# Altium PCB Main.PcbDoc (part 1 of 2)
Units mm, origin at the board's own origin, x right, y up, seen from the top; angles counter-clockwise.
Board outline 229.74 x 100.58 mm, 4 copper layers (Top Layer, Layer 1, Layer 2, Bottom Layer), stack 0.68 mm thick; 134 components, 86 nets, 560 pads, 37 vias.
Unrouted connection lines stored in the file: 186.
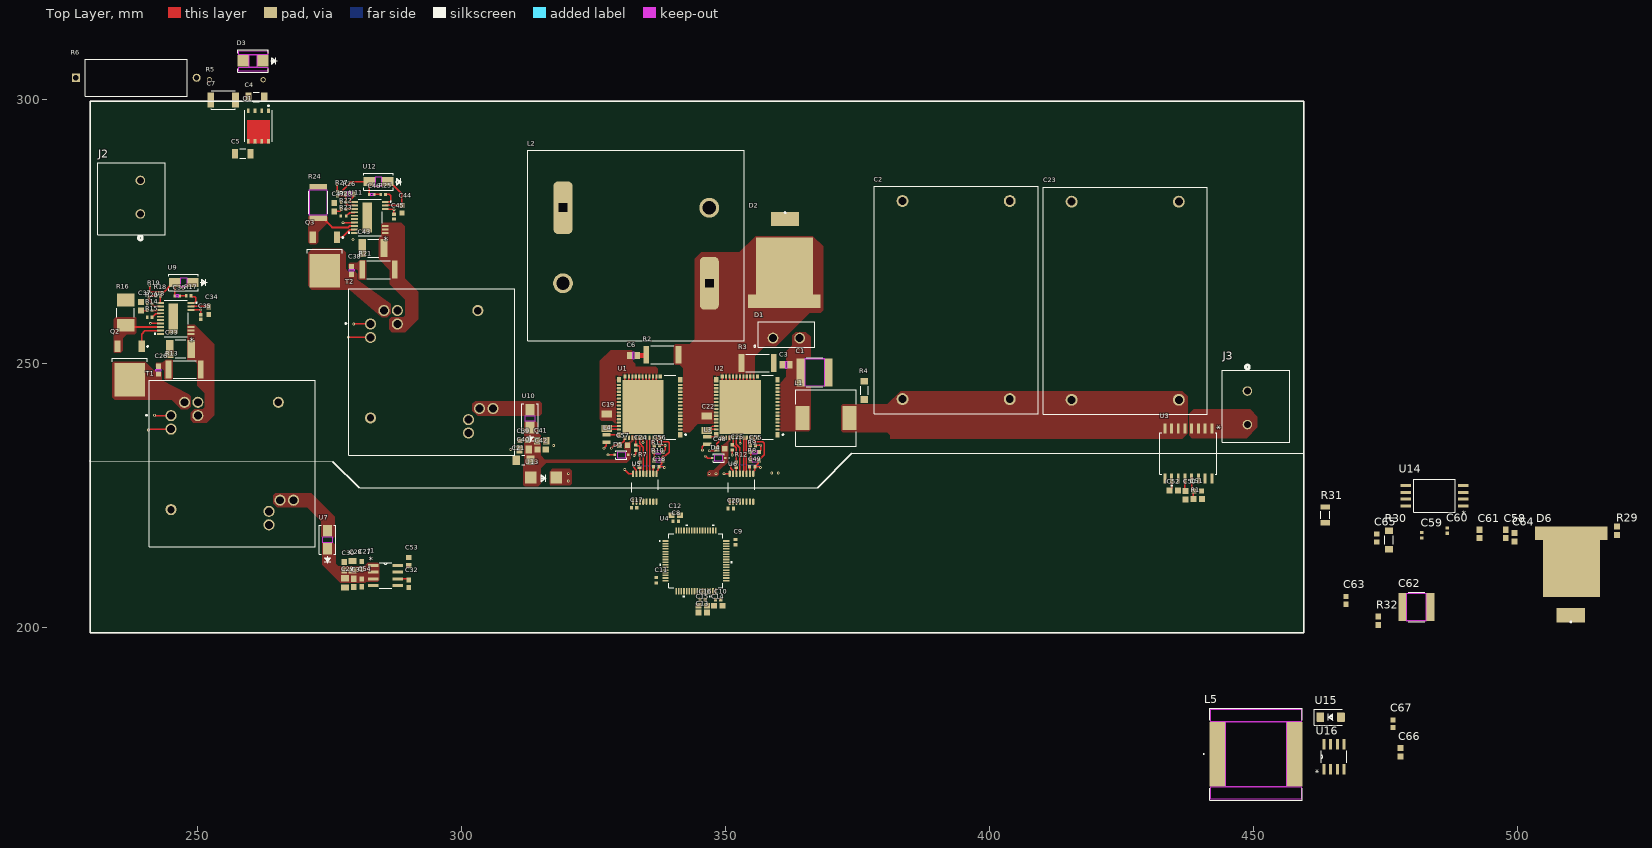
[diagram p0: Top Layer view]
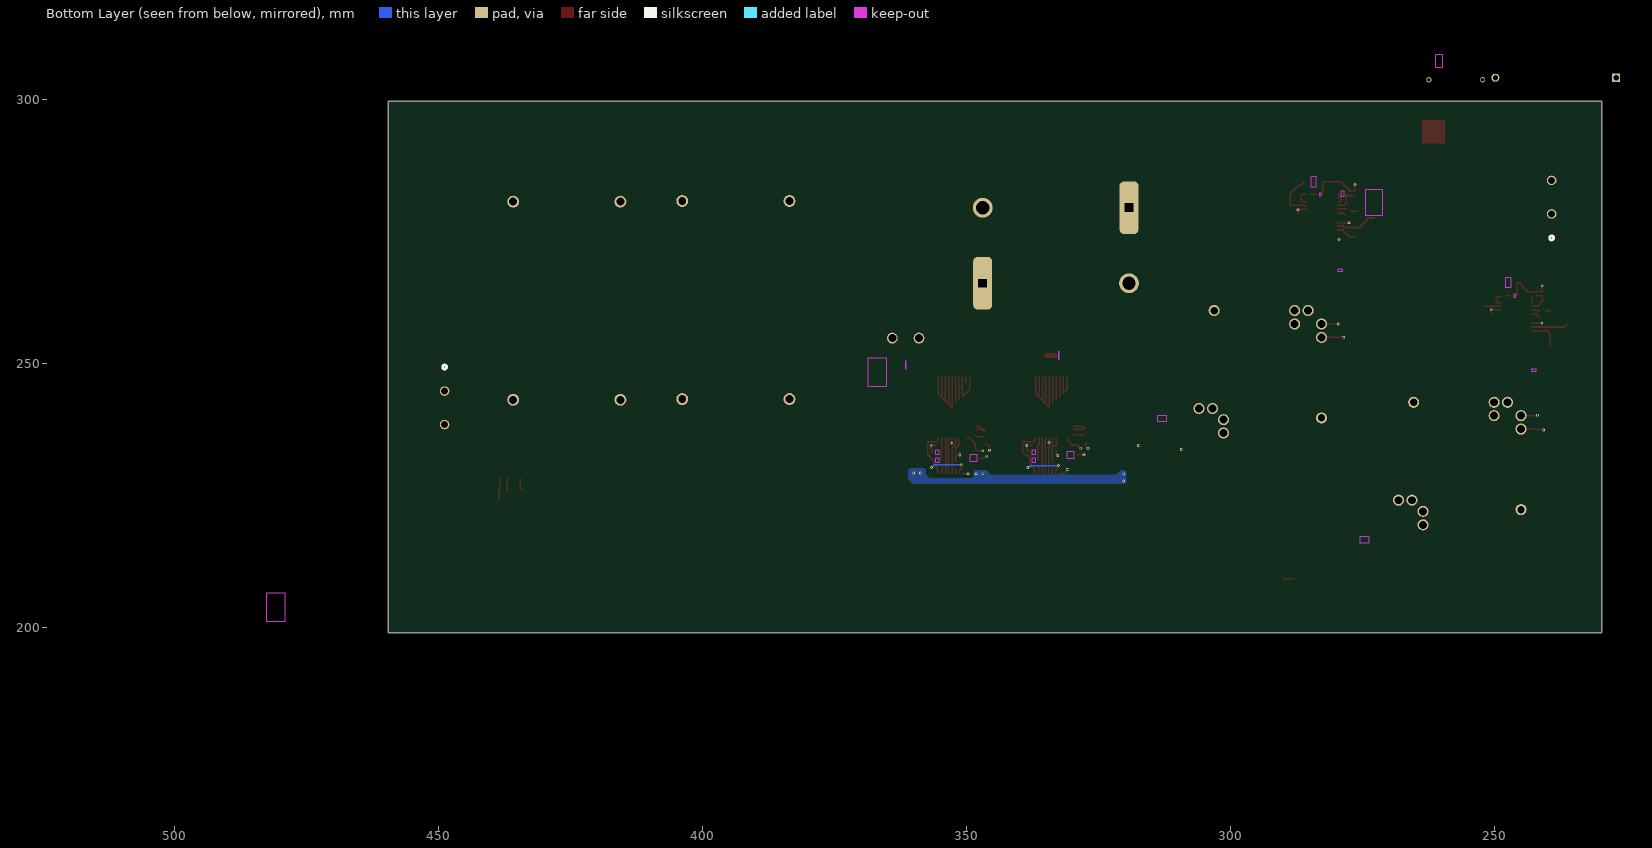
[diagram p1: Bottom Layer view, seen from below]
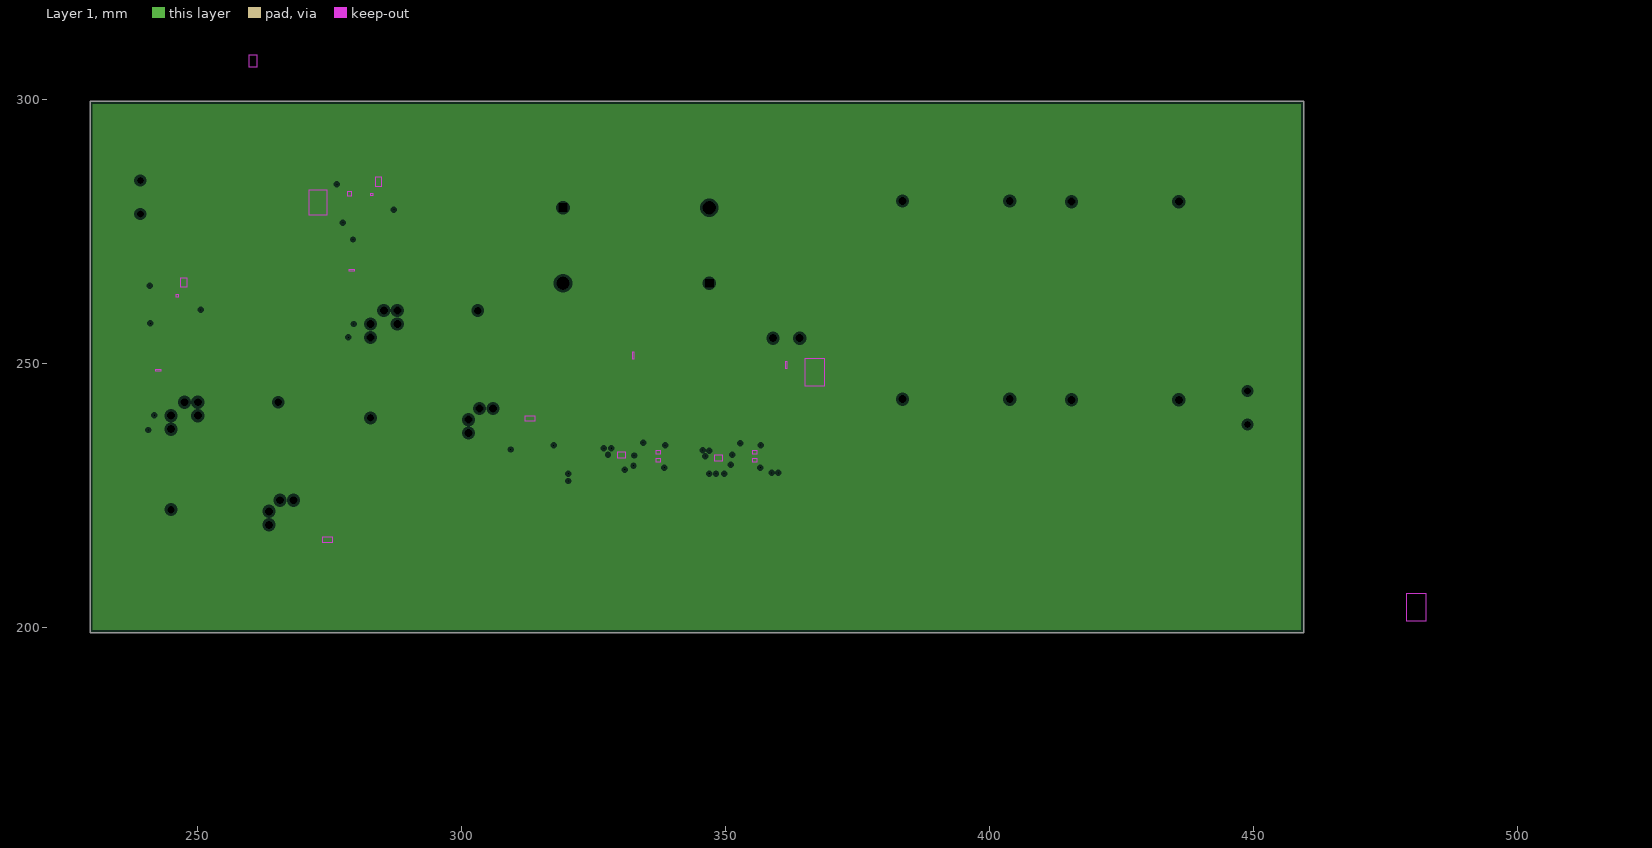
[diagram p2: Layer 1, clearances drawn from the general rule]
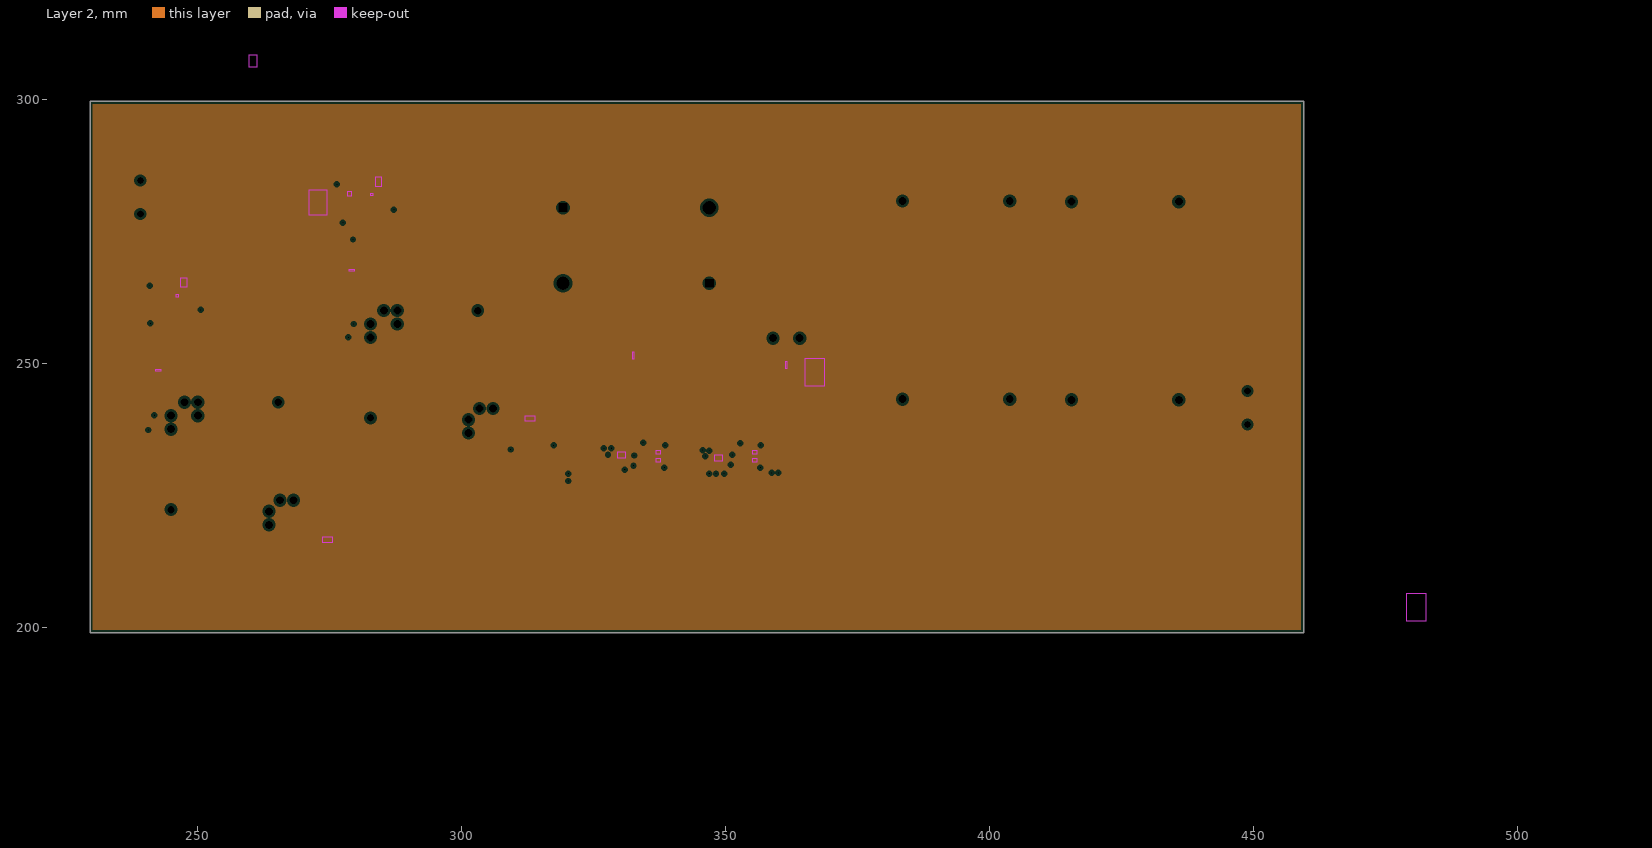
[diagram p3: Layer 2, clearances drawn from the general rule]

## Layer stack, top to bottom
Top Solder: solder mask 0.0102, Solder Resist, Dk 3.5
Top Layer: signal copper 0.127
Dielectric 2: prepreg 0.1524, PP-018, Dk 4.3
Layer 1: plane copper 0.035
Dielectric 1: core 0.0508, Core-001, Dk 4.1
Layer 2: plane copper 0.035
Dielectric 3: prepreg 0.1524, PP-018, Dk 4.3
Bottom Layer: signal copper 0.127
Bottom Solder: solder mask 0.0102, Solder Resist, Dk 3.5

## Board outline
229.743,199.009 229.743,299.593 459.486,299.593 459.486,199.009

## Design rules (kind name [scope] priority, off if disabled: settings)
BoardOutlineClearance [All] p1: gap=0.2 ignorepadtopadclearanceinfootprint=FALSE
Clearance ClearanceMidLayer1 [OnLayer('Mid Layer 1') Or IsVia Or IsThruPin vs OnLayer('Mid Layer 1')] p1: gap=0.102 ignorepadtopadclearanceinfootprint=FALSE except(0.127: Arc-Via Track-Via SMDPad-Via THPad-Via Via-Via Via-Fill Via-Poly Via-Region Via-Text; 0.25: Arc-Hole Track-Hole SMDPad-Hole THPad-Hole Via-Hole Fill-Hole Poly-Hole Region-Hole Text-Hole)
Clearance ClearanceTopLayer [OnLayer('Top Layer') Or IsVia Or IsThruPin vs OnLayer('Top Layer') Or IsVia Or IsThruPin] p2: gap=0.203 ignorepadtopadclearanceinfootprint=TRUE except(0.25: Arc-Hole Track-Hole SMDPad-Hole THPad-Hole Via-Hole Fill-Hole Poly-Hole Region-Hole Text-Hole)
Clearance ClearanceBottomLayer [OnLayer('Bottom Layer') Or IsVia Or IsThruPin vs OnLayer('Bottom Layer') Or IsVia Or IsThruPin] p3: gap=0.203 ignorepadtopadclearanceinfootprint=FALSE except(0.25: Arc-Hole Track-Hole SMDPad-Hole THPad-Hole Via-Hole Fill-Hole Poly-Hole Region-Hole Text-Hole)
Clearance ClearanceMidLayer2 [OnLayer('Mid Layer 2') Or IsVia Or IsThruPin vs OnLayer('Mid Layer 2')] p4: gap=0.102 ignorepadtopadclearanceinfootprint=FALSE except(0.127: Arc-Via Track-Via SMDPad-Via THPad-Via Via-Via Via-Fill Via-Poly Via-Region Via-Text; 0.25: Arc-Hole Track-Hole SMDPad-Hole THPad-Hole Via-Hole Fill-Hole Poly-Hole Region-Hole Text-Hole)
ComponentClearance [All] p1: gap=0.102 collisioncheckmode=3 verticalgap=0.102 showdistances=TRUE
DiffPairsRouting [All] p1: maxlimit=0.203 minlimit=0.203 mostfreqgap=0.203 toplayer_minwidth=0.203 toplayer_maxwidth=1816.048 toplayer_prefwidth=0.203 bottomlayer_minwidth=0.203 bottomlayer_maxwidth=1816.048 bottomlayer_prefwidth=0.203 maxuncoupledlength=12.7
Height [All] p1: minheight=0 maxheight=1816.048 prefheight=12.7
HoleSize [All] p1: absolutevalues=TRUE maxlimit=6.3 minlimit=0.2 maxpercent=80.000 minpercent=20.000
HoleToHoleClearance [All] p1: gap=0.25 allowstackedmicrovias=FALSE
MatchedLengths MatchedLengths_LP [InNetClass('HighSpeed_LP')] p1: tolerance=25.4 checknetsindiffpair=FALSE checkdiffpairvsdiffpair=TRUE checkxsignals=TRUE checkothers=TRUE usedelayunits=TRUE delaytolerance=100.000000
MatchedLengths MatchedLengths_HP [InNetClass('HighSpeed_HP')] p2: tolerance=25.4 checknetsindiffpair=FALSE checkdiffpairvsdiffpair=TRUE checkxsignals=TRUE checkothers=TRUE usedelayunits=TRUE delaytolerance=100.000000
MinimumAnnularRing [All] p1: minimumring=0.1
MinimumSolderMaskSliver [All] p1: minsoldermaskwidth=0
PlaneClearance PlaneClearanceMidLayer1 [OnLayer('Mid Layer 1')] p1: clearance=0.102
PlaneClearance PlaneClearanceMidLayer2 [OnLayer('Mid Layer 2')] p2: clearance=0.102
PlaneClearance PlaneClearanceTopLayer [OnLayer('Top Layer')] p3: clearance=0.203
PlaneClearance PlaneClearanceBottomLayer [OnLayer('Bottom Layer')] p4: clearance=0.203
PlaneConnect PlaneConnectPowerPads [InPadClass('PowerPads')] p1: planeconnectstyle=Direct reliefexpansion=0.508 reliefentries=4 reliefconductorwidth=0.254 reliefairgap=0.254
PlaneConnect PlaneConnectTopLayer [OnLayer('Top Layer')] p2: pad.planeconnectstyle=Relief pad.reliefexpansion=0.3 pad.reliefentries=4 pad.reliefconductorwidth=0.203 pad.reliefairgap=0.203 via.planeconnectstyle=Direct via.reliefexpansion=0.3 via.reliefentries=4 via.reliefconductorwidth=0.127 via.reliefairgap=0.127
PlaneConnect PlaneConnectBottomLayer [OnLayer('Bottom Layer')] p3: pad.planeconnectstyle=Relief pad.reliefexpansion=0.3 pad.reliefentries=4 pad.reliefconductorwidth=0.203 pad.reliefairgap=0.203 via.planeconnectstyle=Direct via.reliefexpansion=0.3 via.reliefentries=4 via.reliefconductorwidth=0.127 via.reliefairgap=0.127
PlaneConnect PlaneConnectMidLayer1 [OnLayer('Mid Layer 1')] p4: pad.planeconnectstyle=Relief pad.reliefexpansion=0.3 pad.reliefentries=4 pad.reliefconductorwidth=0.102 pad.reliefairgap=0.102 via.planeconnectstyle=Direct via.reliefexpansion=0.3 via.reliefentries=4 via.reliefconductorwidth=0.127 via.reliefairgap=0.127
PlaneConnect PlaneConnectMidLayer2 [OnLayer('Mid Layer 2')] p5: pad.planeconnectstyle=Relief pad.reliefexpansion=0.3 pad.reliefentries=4 pad.reliefconductorwidth=0.102 pad.reliefairgap=0.102 via.planeconnectstyle=Direct via.reliefexpansion=0.3 via.reliefentries=4 via.reliefconductorwidth=0.127 via.reliefairgap=0.127
PolygonConnect SWPoly [InNet('SW') vs HasFootprint('RQZ0054A-MFG')] p1: thpad.connectstyle=Direct thpad.reliefconductorwidth=0.203 thpad.reliefentries=4 thpad.polygonreliefangle="90 Angle" thpad.airgapwidth=0.203 smdpad.connectstyle=Relief smdpad.reliefconductorwidth=0.203 smdpad.reliefentries=4 smdpad.polygonreliefangle="90 Angle" smdpad.airgapwidth=0.203 via.connectstyle=Direct via.reliefconductorwidth=0.203 via.reliefentries=4 via.polygonreliefangle="90 Angle" via.airgapwidth=0.203
PolygonConnect UnfilteredOutputPoly [InNet('UNFILTERED_OUTPUT') vs HasFootprint('RQZ0054A-MFG')] p2: thpad.connectstyle=Direct thpad.reliefconductorwidth=0.203 thpad.reliefentries=4 thpad.polygonreliefangle="90 Angle" thpad.airgapwidth=0.203 smdpad.connectstyle=Relief smdpad.reliefconductorwidth=0.203 smdpad.reliefentries=4 smdpad.polygonreliefangle="90 Angle" smdpad.airgapwidth=0.203 via.connectstyle=Direct via.reliefconductorwidth=0.203 via.reliefentries=4 via.polygonreliefangle="90 Angle" via.airgapwidth=0.203
PolygonConnect PGNDPoly [InNet('PGND') vs HasFootprint('RQZ0054A-MFG')] p3: thpad.connectstyle=Direct thpad.reliefconductorwidth=0.203 thpad.reliefentries=4 thpad.polygonreliefangle="90 Angle" thpad.airgapwidth=0.203 smdpad.connectstyle=Relief smdpad.reliefconductorwidth=0.203 smdpad.reliefentries=4 smdpad.polygonreliefangle="90 Angle" smdpad.airgapwidth=0.203 via.connectstyle=Direct via.reliefconductorwidth=0.127 via.reliefentries=4 via.polygonreliefangle="90 Angle" via.airgapwidth=0.127
PolygonConnect TopLayerBasic [All] p4: connectstyle=Direct reliefconductorwidth=0.203 reliefentries=4 polygonreliefangle="90 Angle" airgapwidth=0.203
PolygonConnect PolygonConnectPowerPads [All vs (InPadClass('PowerPads'))] p5: connectstyle=Direct reliefconductorwidth=0.254 reliefentries=4 polygonreliefangle="90 Angle" airgapwidth=0.254
PolygonConnect PolygonConnectMidLayer1 [OnLayer('Mid Layer 1') vs OnLayer('Mid Layer 1')] p6: thpad.connectstyle=Relief thpad.reliefconductorwidth=0.102 thpad.reliefentries=4 thpad.polygonreliefangle="90 Angle" thpad.airgapwidth=0.102 smdpad.connectstyle=Relief smdpad.reliefconductorwidth=0.102 smdpad.reliefentries=4 smdpad.polygonreliefangle="90 Angle" smdpad.airgapwidth=0.102 via.connectstyle=Direct via.reliefconductorwidth=0.127 via.reliefentries=4 via.polygonreliefangle="90 Angle" via.airgapwidth=0.127
PolygonConnect PolygonConnectMidLayer2 [OnLayer('Mid Layer 2') vs OnLayer('Mid Layer 2')] p7: thpad.connectstyle=Relief thpad.reliefconductorwidth=0.102 thpad.reliefentries=4 thpad.polygonreliefangle="90 Angle" thpad.airgapwidth=0.102 smdpad.connectstyle=Relief smdpad.reliefconductorwidth=0.102 smdpad.reliefentries=4 smdpad.polygonreliefangle="90 Angle" smdpad.airgapwidth=0.102 via.connectstyle=Direct via.reliefconductorwidth=0.127 via.reliefentries=4 via.polygonreliefangle="90 Angle" via.airgapwidth=0.127
PolygonConnect "RC Cap Lowside" [HasFootprint('CAPC220145_140N_KEM-L') vs OnLayer('Top Layer')] p8: connectstyle=Direct reliefconductorwidth=0.203 reliefentries=4 polygonreliefangle="90 Angle" airgapwidth=0.203
PolygonConnect PolygonConnectBottomLayer [OnLayer('Bottom Layer') vs OnLayer('Bottom Layer')] p9: thpad.connectstyle=Relief thpad.reliefconductorwidth=0.203 thpad.reliefentries=4 thpad.polygonreliefangle="90 Angle" thpad.airgapwidth=0.203 smdpad.connectstyle=Relief smdpad.reliefconductorwidth=0.203 smdpad.reliefentries=4 smdpad.polygonreliefangle="90 Angle" smdpad.airgapwidth=0.203 via.connectstyle=Direct via.reliefconductorwidth=0.127 via.reliefentries=4 via.polygonreliefangle="90 Angle" via.airgapwidth=0.127
RoutingVias [All] p1: holewidth=0.2 width=0.4 viastyle="Through Hole" minholewidth=0.2 minwidth=0.45 maxholewidth=6 maxwidth=6.55
SilkToSilkClearance [All] p1: silktosilkclearance=0
SilkToSolderMaskClearance [IsPad] p1: minsilkscreentomaskgap=0.102 clearancetoexposedcopper=TRUE
SolderMaskExpansion [All] p1: expansion=0.075 istentingtop=FALSE
SupplyNets "Schematic Supply Nets_7" [InNet('PGND')] p1: voltage=0.000
SupplyNets "Schematic Supply Nets_6" [InNet('HT+')] p2: voltage=0.000
SupplyNets "Schematic Supply Nets_5" [InNet('VBAT+')] p3: voltage=0.000
SupplyNets "Schematic Supply Nets_4" [InNet('3V3')] p4: voltage=0.000
SupplyNets "Schematic Supply Nets_3" [InNet('SW')] p5: voltage=0.000
SupplyNets "Schematic Supply Nets_2" [InNet('5V_Ctrl')] p6: voltage=0.000
SupplyNets "Schematic Supply Nets_1" [InNet('GND')] p7: voltage=0.000
SupplyNets "Schematic Supply Nets" [InNet('12V_Gate')] p8: voltage=0.000
Width General [All] p1: maxlimit=0.254 minlimit=0.254 preferedwidth=0.254
Width VBAT_Width [InNet('VBAT+')] p2: maxlimit=7 minlimit=6.9 preferedwidth=6.908
20 further rules are at their usual default settings.

## Components (designator, comment, footprint, x,y, rotation, side; value= is the part's Value field where it differs from the comment)
C1 "GRM55DR7LV474KW01K" G-55_MUR 366.903,248.285 r180 top
C2 "890764428004CS" WCAP-FTDB_L42W30H45 393.69,261.955 r270 top
C3 "C0805C330JDGACTU" CAPC220145_140N_KEM-L 361.503,249.682 r180 top
C4 "CC1206JKNPOZBN472" CAPC3216X88N 261.239,300.355 r180 top
C5 "C1206C102J2GACTU" CAPC3216X88N 258.65,289.687 r0 top value=1nF
C6 "C0805C330JDGACTU" CAPC220145_140N_KEM-L 332.613,251.46 r0 top
C7 "C4532C0G2E473J320KA" CAP_C4532C0G2E473J320KA 254.953,299.847 r180 top
C8 "CC0402KRX7R7BB104" CAP-0402 340.614,220.091 r0 top
C9 "CC0402KRX7R7BB104" CAP-0402 351.917,216.154 r270 top
C10 "CC0402KRX7R7BB104" CAP-0402 348.623,205.232 r0 top
C11 "CC0402KRX7R7BB104" CAP-0402 336.931,208.915 r90 top
C12 "CC0603KRX5R8BB475" CAP-0603 340.614,221.234 r0 top
C13 "CC0603KRX7R7BB105" CAP-0603 345.694,202.819 r180 top
C14 "CC0603KPX7R9BB103" CAP-0603 348.653,204.089 r0 top
C15 "CC0603KRX7R7BB105" CAP-0603 345.694,204.089 r180 top
C16 "CC0402KRX7R7BB104" CAP-0402 345.694,205.232 r180 top
C17 "CC0402KRX7R7BB104" CAP-0402 332.74,222.631 r180 top
C18 "CC0402KRX7R7BB104" CAP-0402 336.931,230.378 r0 top
C19 "CC1206KKX7R0BB225" CAP-1206 327.533,239.014 r270 top
C20 "CC0402KRX7R7BB104" CAP-0402 351.028,222.504 r180 top
C21 "C3216X5R1E476M160AC" CAPC3216X180N 311.785,231.648 r0 top
C22 "CC1206KKX7R0BB225" CAP-1206 346.456,238.633 r270 top
C23 "890764428004CS" WCAP-FTDB_L42W30H45 425.694,261.828 r270 top
C24 "CC0402JRNPO9BN101" CAP-0402 333.04,234.015 r270 top
C25 "CC0402JRNPO9BN101" CAP-0402 351.282,234.053 r270 top
C26 "C0603C152JAGACAUTO" CAPC17595_92N_KEM 242.697,248.7 r270 top
C27 "CC0603KRX7R9BB104" YAG_CC0603_YAG 281.178,211.747 r270 top
C28 "CC0805KKX7R9BB105" CAP-0805 279.425,211.671 r90 top
C29 "CC0805KKX7R9BB105" CAP-0805 278.003,208.407 r270 top
C30 "CC0603KRX5R8BB475" CAP-0603 277.876,211.582 r90 top
C31 "CC0603KRX5R8BB475" CAP-0603 279.654,208.407 r270 top
C32 "CC0603KRX7R9BB104" YAG_CC0603_YAG 290.068,208.28 r90 top
C33 "18122C105KAT2A" CAPC4532X279N 246.888,252.73 r0 top
C34 "CC0603KRX7R9BB104" YAG_CC0603_YAG 252.222,259.969 r90 top
C35 "GRM155R61E225KE11D" CAPC1005X70N 250.698,258.768 r270 top
C36 "C0402C470F5GACTU" CAPC10555_55N_KEM 246.253,262.763 r180 top
C37 "CC0603JRX7R9BB224" CAP-0603 239.395,260.769 r90 top
C38 "C0603C152JAGACAUTO" CAPC17595_92N_KEM 279.273,267.589 r270 top
C39 "CC0603KRX7R9BB104" YAG_CC0603_YAG 311.874,235.331 r0 top
C40 "CC0805KKX7R9BB105" CAP-0805 311.903,233.68 r180 top
C41 "CC0805KKX7R9BB105" CAP-0805 315.214,235.331 r0 top
C42 "CC0603KRX5R8BB475" CAP-0603 315.214,233.68 r0 top
C43 "18122C105KAT2A" CAPC4532X279N 283.337,271.78 r0 top
C44 "CC0603KRX7R9BB104" YAG_CC0603_YAG 288.798,279.146 r90 top
C45 "GRM155R61E225KE11D" CAPC1005X70N 287.274,277.749 r270 top
C46 "C0402C470F5GACTU" CAPC10555_55N_KEM 283.083,281.94 r180 top
C47 "CC0603JRX7R9BB224" CAP-0603 275.971,279.527 r90 top
C48 "GRM188R61E106KA73D" CAPC1608X100N 349.123,233.807 r0 top
C49 "CC0402KRX7R7BB104" CAP-0402 355.092,230.378 r180 top
C50 "CC0603KRX5R8BB475" CAP-0603 437.134,225.044 r270 top
C51 "CC0603KRX7R9BB104" YAG_CC0603_YAG 439.42,225.806 r180 top
C52 "CC0603KRX7R7BB105" CAP-0603 434.848,225.933 r0 top
C53 "GRM188C81C106MA73D" CAPC1608X100N 290.068,212.468 r270 top
C54 "CC0603KRX7R9BB104" YAG_CC0603_YAG 281.178,208.407 r90 top
C55 "CC0402JRNPO9BN101" CAP-0402 355.219,234.442 r0 top
C56 "CC0402JRNPO9BN101" CAP-0402 337.058,234.442 r0 top
C57 "GRM188R61E106KA73D" CAPC1608X100N 330.711,234.442 r0 top
C58 "CC0603KRX7R7BB105" CAP-0603 497.713,217.678 r90 top
C59 "CC0402KRX7R7BB104" CAP-0402 481.838,217.432 r90 top
C60 "CC0402KRX7R7BB104" CAP-0402 486.664,218.313 r90 top
C61 "CC0603KRX7R7BB105" CAP-0603 492.76,217.678 r90 top
C62 "GRM55DR7LV474KW01K" G-55_MUR 480.822,203.835 r0 top
C63 "CC0603KRX7R9BB104" YAG_CC0603_YAG 467.487,205.105 r90 top
C64 "CC0603KPX7R9BB103" CAP-0603 499.364,217.043 r90 top
C65 "GRM188C81C106MA73D" CAPC1608X100N 473.329,216.916 r90 top
C66 "CC0603KRX5R8BB475" CAP-0603 477.774,176.365 r90 top
C67 "CC0603KRX7R9BB104" YAG_CC0603_YAG 476.377,181.737 r90 top
D1 "STTH12R06D" TO-220AC_STM 359.029,254.762 r0 top
D2 "PTVS1-240C-M" DIO-SOD128 361.315,275.082 r180 top
D3 "P6SMB15A" P6SMBSERIES_LTF 260.604,307.213 r180 top
D4 "MM3Z16VT1G" SOD-323_1P8X1P35_ONS-L 348.742,232.029 r180 top
D5 "MM3Z16VT1G" SOD-323_1P8X1P35_ONS-L 330.327,232.664 r180 top
D6 "PTVS1-240C-M" DIO-SOD128 510.032,204.47 r0 top
J1 "MCP1727T-3302E/SN" SOIC127P490X175-8N 285.674,209.804 r0 top
J2 "393800102" CONN2_0393800102_524x492_MOL 239.268,278.257 r270 top
J3 "393800102" CONN2_0393800102_524x492_MOL 448.818,244.729 r90 top
L1 "ETQ-P5M2R5YFC" IND_ETQP5_YFC_PAN 369.062,239.649 r180 top
L2 "7443763540330" WE-HCFT_3540_7443763540330 333.121,272.288 r270 top
L3 "B82559A0203A024" IND-4.7uH 346.486,235.463 r270 top
L4 "B82559A0203A024" IND-4.7uH 327.406,235.839 r270 top
L5 "IHLP6767GZER101M11" IND_IHLP-6767GZ_VIS 450.469,176.022 r0 top
Q1 "BSC030P03NS3 G" IFX-PG-TDSON-8-5-V 261.62,294.894 r270 top
Q2 "IPD80R450P7" TO229P994X256-3N-V 237.236,250.038 r270 top
Q3 "IPD80R450P7" TO229P994X256-3N-V 274.199,270.662 r270 top
R1 "RC0603FR-07100KL" RES-0603 439.42,224.282 r0 top
R2 "3521240RFT" RESC6332X65N 338.074,251.587 r180 top
R3 "3521240RFT" RESC6332X65N 356.108,250.063 r0 top
R4 "ERJ-P08J154V" RES_ERJP08J154V 376.301,244.856 r90 top
R5 "MFR-25FTF52-100K" RES-1/4W-THRHOLE 257.429,303.657 r0 top
R6 "VR68000001004JAC00" RES_VR68 249.936,304.038 r0 top
R7 "RC0402FR-07100RL" RES-0402 333.756,230.759 r90 top
R8 "CRCW06030000Z0EAHP" RC0603N_VIS 355.584,231.648 r0 top
R9 "CRCW06030000Z0EAHP" RC0603N_VIS 355.584,233.172 r0 top
R10 "CRCW06030000Z0EAHP" RC0603N_VIS 337.312,231.648 r0 top
R11 "CRCW06030000Z0EAHP" RC0603N_VIS 337.312,233.172 r0 top
R12 "RC0402FR-07100RL" RES-0402 352.044,230.759 r90 top
R13 "CRGP2512F39R" RESC6332X65N 247.65,248.793 r180 top
R14 "ERA-2AEB203X" RESC1005X40N 241.046,259.969 r180 top
R15 "RC0402FR-0763K4L" RESC1005X40N 241.046,258.699 r180 top
R16 "CRM2512-JX-R200ELF" RESC6331X80N 236.474,259.588 r90 top
R17 "CRCW040210K0FKED" RESC1005X40N 248.412,262.763 r0 top
R18 "RT0402BRD0792KL" RESC1005X35N 242.643,262.763 r180 top
R19 "ERJ-2RKF3402X" RES_ERJ2RKF3402X 240.919,263.021 r270 top
R20 "CRCW040210K0FKED" RESC1005X40N 241.046,261.239 r0 top
R21 "CRGP2512F39R" RESC6332X65N 284.353,267.716 r180 top
R22 "ERA-2AEB203X" RESC1005X40N 277.749,279.146 r180 top
R23 "ERJ-2RKF4702X" RES_ERJ2RKF4702X 277.749,277.876 r180 top
R24 "CSRN2512FKR300" STA_CSRN2512_STP 272.923,280.416 r90 top
R25 "CRCW040210K0FKED" RESC1005X40N 285.242,281.94 r180 top
R26 "PNM0603E2502BST5" 0603_VIS 278.892,282.067 r180 top
R27 "RT0402BRD0792KL" RESC1005X35N 276.606,282.121 r270 top
R28 "CRCW040210K0FKED" RESC1005X40N 277.749,280.416 r0 top
R29 "RC0603FR-0747RL" RES-0603 518.795,218.313 r90 top
R30 "ERJ-P08F2403V" RES_ERJP08F2403V 475.615,216.535 r90 top
R31 "RT1206BRD075KL" RESC3116X65N 463.55,221.278 r90 top
R32 "RC0603FR-0747RL" RES-0603 473.583,201.257 r90 top
T1 "750317589" RM10_750317589 256.667,231.013 r0 top
T2 "750317589" RM10_750317589 294.424,248.374 r0 top
U1 "LMG3422R030RQZT" RQZ0054A-MFG 335.661,241.681 r180 top
U2 "LMG3422R030RQZT" RQZ0054A-MFG 354.076,241.681 r180 top
U3 "ACS37002LLAATR-015B3" SOIC_TR-050B5_ALM 437.642,232.918 r270 top
U4 "STM32G474RET6" LQFP64-10X10MM 344.424,212.598 r0 top
U5 "ISO7741FDBQR" DBQ0016A_L 334.772,226.441 r270 top
U6 "ISO7741FDBQR" DBQ0016A_L 353.06,226.441 r270 top
U7 "CDBA140SL-HF" CDBA-HF 274.701,216.586 r90 top
U8 "LT8316EFETRPBF" 05-08-1990_ADI 245.977,258.477 r180 top
U9 "CDBA140SL-HF" CDBA-HF 247.472,265.303 r180 top
U10 "CDBA140SL-HF" CDBA-HF 313.055,239.522 r90 top
U11 "LT8316EFETRPBF" 05-08-1990_ADI 282.721,277.596 r180 top
U12 "CDBA140SL-HF" CDBA-HF 284.353,284.353 r180 top
U13 "GB01SLT06-214" DIO-SHOT-650V-1A 315.468,228.219 r180 top
U14 "AMC1351DWV" SOIC8_DWV_TEX-M 484.251,224.917 r180 top
U15 "SK12" DO-214AC_SMA 464.566,183.007 r0 top
U16 "LM2674MX-5.0/NOPB" SOIC127P490X175-8N 465.201,175.514 r90 top

## Footprints (in the part's own frame and the unit in brackets; to place one, negate y for a bottom-side part, rotate by r counter-clockwise, add the part's x,y. Pads: shape width x height; smd on the part's side, far side on the other; paste and mask are expansions set on the pad)
05-08-1990_ADI [mil]
  rect 51.5x14 smd paste+0 mask+0: 1(-114.25,115.16) 2(-114.25,89.57) 3(-114.25,63.98) 8(-114.25,-63.98) 9(-114.25,-89.57) 10(-114.25,-115.16) 11(114.25,-115.16) 12(114.25,-89.57) 13(114.25,-63.98) 14(114.25,-38.39) 15(114.25,-12.8) 16(114.25,12.8) 17(114.25,38.39) 18(114.25,63.98) 19(114.25,89.57) 20(114.25,115.16)
  rect 70x224 smd paste+0 mask+0: 21(18.5,0)
  silkscreen extent -160,-135 160,135, body extent -126,-130 126,130, height 47
0603_VIS [mm]
  rect 0.703x0.95 smd paste+0 mask+0: 1(-0.737,0) 2(0.737,0)
  Top Layer keep-out region: -0.334,-0.424 -0.334,0.424 0.334,0.424 0.334,-0.424
  Keep-Out Layer region: -0.334,-0.475 -0.334,0.475 0.334,0.475 0.334,-0.475
  body extent -0.88,-0.48 0.88,0.48, height 0.84
CAP-0402 [mm]
  rect 0.6x0.7 smd: 1(-0.5,0) 2(0.5,0)
  body extent -0.5,-0.22 0.5,0.23, height 0.5
CAP-0603 [mm]
  rect 1.15x1.1 smd: 1(-0.8,0) 2(0.8,0)
  body extent -0.8,-0.45 0.8,0.45, height 0.8
CAP-0805 [mm]
  rect 1.16x1.47 smd: 1(-0.88,0) 2(0.88,0)
  body extent -1,-0.63 1,0.63, height 0.94
CAP-1206 [mm]
  rect 1.25x2 smd: 1(-1.375,0) 2(1.375,0)
  body extent -1.6,-0.8 1.6,0.8, height 1.5
CAP_C4532C0G2E473J320KA [mm]
  rect 1.3x2.8 smd: 1(-2.35,0) 2(2.35,0)
  silkscreen extent -2.25,-1.75 2.25,1.75
CAPC1005X70N [mm]
  rect 0.64x0.72 smd: 1(-0.439,0) 2(0.439,0)
CAPC1608X100N [mm]
  rect 1x1.02 smd: 1(-0.759,0) 2(0.759,0)
  body extent -0.8,-0.4 0.8,0.4, height 1
CAPC3216X88N [mm]
  rect 1.16x1.82 smd: 1(-1.475,0) 2(1.475,0)
  silkscreen extent -0.57,-0.9 0.57,0.9, body extent -1.6,-0.8 1.6,0.8, height 0.88
CAPC3216X180N [mm]
  rect 1.44x1.82 smd: 1(-1.336,0) 2(1.336,0)
  silkscreen extent -0.29,-0.9 0.29,0.9, body extent -1.6,-0.8 1.6,0.8, height 1.8
CAPC4532X279N [mm]
  rect 1.41x3.42 smd: 1(-2.049,0) 2(2.049,0)
  silkscreen extent -1.02,-1.7 1.02,1.7, body extent -2.25,-1.6 2.25,1.6, height 2.79
CAPC10555_55N_KEM [mm]
  rect 0.503x0.55 smd paste+0 mask+0: 1(-0.477,0) 2(0.477,0)
  Top Layer keep-out region: -0.174,-0.224 -0.174,0.224 0.174,0.224 0.174,-0.224
  Keep-Out Layer region: -0.174,-0.275 -0.174,0.275 0.174,0.275 0.174,-0.275
  body extent -0.53,-0.28 0.53,0.28, height 0.55
CAPC17595_92N_KEM [mm]
  rect 1.006x0.95 smd paste+0 mask+0: 1(-0.728,0) 2(0.728,0)
  Top Layer keep-out region: -0.174,-0.424 -0.174,0.424 0.174,0.424 0.174,-0.424
  Keep-Out Layer region: -0.174,-0.475 -0.174,0.475 0.174,0.475 0.174,-0.475
  body extent -0.87,-0.48 0.87,0.48, height 0.92
CAPC220145_140N_KEM-L [mm]
  rect 1.102x1.399 smd paste+0 mask+0: 1(-0.701,0) 2(0.701,0)
  Top Layer keep-out region: -0.099,-0.674 -0.099,0.674 0.099,0.674 0.099,-0.674
  Keep-Out Layer region: -0.099,-0.725 -0.099,0.725 0.099,0.725 0.099,-0.725
  body extent -1.1,-0.72 1.1,0.72, height 1.4
CDBA-HF [mil]
  rect 87x67 smd paste+0 mask+0: 1(-67,0) 2(67,0)
  Keep-Out Layer region: -21.5,-35.5 -21.5,35.5 21.5,35.5 21.5,-35.5
  silkscreen extent -174,-62 110,62, body extent -104,-57 104,57, height 100
CONN2_0393800102_524x492_MOL [mil]
  round 71 / inner round 60 / far side round 71 hole 51 paste-99999 mask+0: 1(0,0) 2(-250,0)
  silkscreen extent -380,-316 194,186, body extent -372,-315 152,177, height 846
DBQ0016A_L [mm]
  oval 1.25x0.4 smd paste+0 mask+0: 1(-2.625,2.222) 2(-2.625,1.587) 3(-2.625,0.952) 4(-2.625,0.317) 5(-2.625,-0.318) 6(-2.625,-0.953) 7(-2.625,-1.588) 8(-2.625,-2.223) 9(2.625,-2.222) 10(2.625,-1.587) 11(2.625,-0.952) 12(2.625,-0.317) 13(2.625,0.318) 14(2.625,0.953) 15(2.625,1.588) 16(2.625,2.223)
  silkscreen extent -1.53,-2.5 0.9,2.55, body extent -3.01,-2.45 3.01,2.45, height 1.62
DIO-SHOT-650V-1A [mm]
  rect 2.2x2.26 / inner rect 2.2x2.26 / far side rect 0x0 all layers, no hole paste-2539.97: 1(-2.54,-0.127) 2(2.286,-0.127)
  silkscreen extent -0.5,-0.64 0.27,0.64
DIO-SOD128 [mm]
  rect 10.8x10.92 smd: 1(0.127,6.731)
  rect 13.72x2.54 smd: 1(0.127,13.335)
  rect 5.33x2.7 smd: 2(0,-2.2)
  silkscreen extent -0.13,-3.55 0.12,-3.3
DO-214AC_SMA [mm]
  rrect25% 1.5x1.8 smd: A(1.95,0) K(-1.95,0)
  silkscreen extent -3.1,-1.5 2.25,1.5, body extent -2.53,-1.35 2.52,1.35, height 2.17
G-55_MUR [mil]
  rect 61x209 smd paste+0 mask+0: 1(-103.5,0) 2(103.5,0)
  Top Layer keep-out region: -71,-102.5 -71,102.5 71,102.5 71,-102.5
  Keep-Out Layer region: -71,-104.5 -71,104.5 71,104.5 71,-104.5
  silkscreen extent -61,-110 61,110, body extent -120,-104 120,104, height 252
IFX-PG-TDSON-8-5-V [mm] "TDSON 8, SMD, 1.27 mm Pitch, 8 Pin, 5.90 mm L X 5.15 mm W X 1.00 mm H body"
  rect 0.815x0.5 smd paste-0.05 mask+0: 1(-2.88,1.905) 2(-2.88,0.635) 3(-2.88,-0.635) 4(-2.88,-1.905)
  rect 0.815x0.5 smd paste-0.05 mask-0.3: 5(2.88,-1.905) 6(2.88,-0.635) 7(2.88,0.635) 8(2.88,1.905)
  Top Layer region: -1.13,-2.155 3.29,-2.155 3.29,2.155 -1.13,2.155
  silkscreen extent -3.96,-2.6 3,2.6, body extent -3.07,-2.7 3.08,2.7, height 1.01
IND-4.7uH [mm]
  rect 0.65x1.6 / inner rect 0.65x1.6 / far side rect 0x0 all layers, no hole paste-2539.97 mask-0.7: 1(-0.6,0.1) 2(0.767,0.097)
IND_ETQP5_YFC_PAN [mil]
  rect 105x177 smd paste+0 mask+0: 1(-174,0) 2(174,0)
  silkscreen extent -226,-210 226,210, body extent -221,-204 221,204, height 215
IND_IHLP-6767GZ_VIS [mil]
  rect 119x480 smd paste+0 mask+0: 1(-286.5,0) 2(286.5,0)
  Top Layer keep-out region: -338,-335.5 -338,-242 338,-242 338,-335.5
  Top Layer keep-out region: -338,242 -338,335.5 338,335.5 338,242
  Top Layer keep-out region: -225,-242 -225,242 225,242 225,-242
  Top Layer keep-out region: -225,-242 -225,242 225,242 225,-242
  silkscreen extent -393,-342 345,342, body extent -340,-337 340,337, height 278
LQFP64-10X10MM [mm]
  rect 1.194x0.305 smd paste+0 mask+0: 1(-5.75,3.75) 2(-5.75,3.25) 3(-5.75,2.75) 4(-5.75,2.25) 5(-5.75,1.75) 6(-5.75,1.25) 7(-5.75,0.75) 8(-5.75,0.25) 9(-5.75,-0.25) 10(-5.75,-0.75) 11(-5.75,-1.25) 12(-5.75,-1.75) 13(-5.75,-2.25) 14(-5.75,-2.75) 15(-5.75,-3.25) 16(-5.75,-3.75) 33(5.75,-3.75) 34(5.75,-3.25) 35(5.75,-2.75) 36(5.75,-2.25) 37(5.75,-1.75) 38(5.75,-1.25) 39(5.75,-0.75) 40(5.75,-0.25) 41(5.75,0.25) 42(5.75,0.75) 43(5.75,1.25) 44(5.75,1.75) 45(5.75,2.25) 46(5.75,2.75) 47(5.75,3.25) 48(5.75,3.75)
  rect 0.305x1.194 smd paste+0 mask+0: 17(-3.75,-5.75) 18(-3.25,-5.75) 19(-2.75,-5.75) 20(-2.25,-5.75) 21(-1.75,-5.75) 22(-1.25,-5.75) 23(-0.75,-5.75) 24(-0.25,-5.75) 25(0.25,-5.75) 26(0.75,-5.75) 27(1.25,-5.75) 28(1.75,-5.75) 29(2.25,-5.75) 30(2.75,-5.75) 31(3.25,-5.75) 32(3.75,-5.75) 49(3.75,5.75) 50(3.25,5.75) 51(2.75,5.75) 52(2.25,5.75) 53(1.75,5.75) 54(1.25,5.75) 55(0.75,5.75) 56(0.25,5.75) 57(-0.25,5.75) 58(-0.75,5.75) 59(-1.25,5.75) 60(-1.75,5.75) 61(-2.25,5.75) 62(-2.75,5.75) 63(-3.25,5.75) 64(-3.75,5.75)
  silkscreen extent -6.93,-6.85 6.85,6.85, body extent -6,-6 6,6, height 1.6
P6SMBSERIES_LTF [mil]
  rect 85.59x86 smd paste+0 mask+0: 1(-73.11,0) 2(73.11,0)
  Top Layer keep-out region: -28.32,-45 -28.32,45 28.32,45 28.32,-45
  Top Layer keep-out region: -108,45 -108,75.5 108,75.5 108,45
  Top Layer keep-out region: -108,-75.5 -108,-45 108,-45 108,-75.5
  Keep-Out Layer region: -28.32,-45 -28.32,45 28.32,45 28.32,-45
  silkscreen extent -180,-83 115,83, body extent -110,-77 110,77, height 98
RC0603N_VIS [mm]
  rect 0.756x0.8 smd paste+0 mask+0: 1(-0.778,0) 2(0.778,0)
  Top Layer keep-out region: -0.349,-0.349 -0.349,0.349 0.349,0.349 0.349,-0.349
  Keep-Out Layer region: -0.349,-0.4 -0.349,0.4 0.349,0.4 0.349,-0.4
  body extent -0.8,-0.4 0.8,0.4, height 0.71
RES-1/4W-THRHOLE [mm]
  round 1 / inner rect 1.473x0.559 / far side round 1 hole 0.7 paste-2539.97 mask-0.737: 1(-5.08,0) 2(5.08,0)
RES-0402 [mm]
  rect 0.6x0.7 smd: 1(-0.5,0) 2(0.5,0)
  body extent -0.5,-0.25 0.5,0.25, height 0.3
RES-0603 [mm]
  rect 1.15x1.1 smd: 1(-0.8,0) 2(0.8,0)
  body extent -0.8,-0.4 0.8,0.4, height 0.43
RES_ERJ2RKF3402X [mm]
  rect 0.475x0.5 smd: 1(-0.512,0) 2(0.512,0)
RES_ERJ2RKF4702X [mm]
  rect 0.475x0.5 smd: 1(-0.512,0) 2(0.512,0)
RES_ERJP08F2403V [mm]
  rect 1.25x1.5 smd: 1(-1.725,0) 2(1.725,0)
  silkscreen extent -0.78,-0.8 0.78,0.8, body extent -1.7,-0.8 1.5,0.8, height 0.6
RES_ERJP08J154V [mm]
  rect 1.25x1.5 smd: 1(-1.725,0) 2(1.725,0)
  silkscreen extent -0.78,-0.8 0.78,0.8
RES_VR68 [mil]
  rect 60x60 / inner round 60 / far side rect 60x60 hole 40 paste-99999 mask-30: 1(-900,0)
  round 60 hole 38 paste-99999 mask-30: 2(0,0)
  silkscreen extent -830,-139 -70,139, body extent -915,-135 15,133, height 268
RESC1005X35N [mm]
  rect 0.56x0.6 smd: 1(-0.435,0) 2(0.435,0)
RESC1005X40N [mm]
  rect 0.51x0.6 smd: 1(-0.445,0) 2(0.445,0)
RESC3116X65N [mm]
  rect 0.97x1.73 smd: 1(-1.48,0) 2(1.48,0)
  silkscreen extent -0.67,-0.85 0.67,0.85, body extent -1.55,-0.8 1.55,0.8, height 0.65
RESC6331X80N [mm]
  rect 2.44x3.32 smd: 1(-2.39,0) 2(2.39,0)
  silkscreen extent -0.85,-1.65 0.85,1.65
RESC6332X65N [mm]
  rect 1.07x3.37 smd: 1(-3.055,0) 2(3.055,0)
  silkscreen extent -2.2,-1.68 2.2,1.68, body extent -3.18,-1.6 3.18,1.6, height 0.65
RM10_750317589 [mm] "Offline Flyback Transformer, THT, body 31.50 x 31.50 mm"
  round 2.1 hole 1.5: 1(-11.595,9.055) 2(-11.595,6.515) 4(6.945,-11.595) 5(6.945,-9.055) 6(9.055,-6.945) 7(11.595,-6.945) 8(-6.515,9.055) 9(-6.515,11.595) 10(-9.055,11.595)
  round 2.1 hole 1.4: MH1(-11.595,-8.725) MH2(8.725,11.595)
  silkscreen extent -16.37,-15.75 15.75,15.75, body extent -13.85,-13.34 13.34,13.86, height 19.25
RQZ0054A-MFG [mm]
  rect 0.8x1.05 smd paste+0 mask+0: 1(-5.8,5.2) 16(-5.8,-5.2) 28(5.8,-5.2) 43(5.8,5.2)
  rect 0.8x0.4 smd paste+0 mask+0: 2(-5.8,4.225) 3(-5.8,3.575) 4(-5.8,2.925) 5(-5.8,2.275) 6(-5.8,1.625) 7(-5.8,0.975) 8(-5.8,0.325) 9(-5.8,-0.325) 10(-5.8,-0.975) 11(-5.8,-1.625) 12(-5.8,-2.275) 13(-5.8,-2.925) 14(-5.8,-3.575) 15(-5.8,-4.225) 29(5.8,-4.225) 30(5.8,-3.575) 31(5.8,-2.925) 32(5.8,-2.275) 33(5.8,-1.625) 34(5.8,-0.975) 35(5.8,-0.325) 36(5.8,0.325) 37(5.8,0.975) 38(5.8,1.625) 39(5.8,2.275) 40(5.8,2.925) 41(5.8,3.575) 42(5.8,4.225)
  rect 0.6x0.8 smd paste+0 mask+0: 17(-2.035,-5.8) 27(4.665,-5.8) 44(4.665,5.8) 54(-2.035,5.8)
  rect 0.4x0.8 smd paste+0 mask+0: 18(-1.285,-5.8) 19(-0.635,-5.8) 20(0.015,-5.8) 21(0.665,-5.8) 22(1.315,-5.8) 23(1.965,-5.8) 24(2.615,-5.8) 25(3.265,-5.8) 26(3.915,-5.8) 45(3.915,5.8) 46(3.265,5.8) 47(2.615,5.8) 48(1.965,5.8) 49(1.315,5.8) 50(0.665,5.8) 51(0.015,5.8) 52(-0.635,5.8) 53(-1.285,5.8)
  rect 7.8x10.2 smd paste-5.087 mask+0: 55(1.25,0)
  silkscreen extent -6.95,-6.05 -2.78,6.05, body extent -6.1,-6 5.9,6, height 0.9
SOD-323_1P8X1P35_ONS-L [mil]
  rect 19x16 smd paste+0 mask+0: 1(-49.5,0) 2(49.5,0)
  Keep-Out Layer region: -27.56,-24.5 -27.56,24.5 27.56,24.5 27.56,-24.5
  silkscreen extent -41,-32 41,32
SOIC8_DWV_TEX-M [mil]
  rect 79x22 smd paste+0 mask+0: 1(-214,75) 2(-214,25) 3(-214,-25) 4(-214,-75) 5(214,-75) 6(214,-25) 7(214,25) 8(214,75)
  silkscreen extent -155,-122 155,122, body extent -231,-117 231,117, height 110
SOIC127P490X175-8N [mil]
  rect 78x22 smd: 1(-93,75) 2(-93,25) 3(-93,-25) 4(-93,-75) 5(93,-75) 6(93,-25) 7(93,25) 8(93,75)
  silkscreen extent -46,-96 46,96, body extent -118,-96 118,96, height 69
SOIC_TR-050B5_ALM [mil]
  rect 74x22 smd paste+0 mask+0: 1(-186.5,175) 2(-186.5,125) 3(-186.5,75) 4(-186.5,25) 5(-186.5,-25) 6(-186.5,-75) 7(-186.5,-125) 8(-186.5,-175) 9(186.5,-175) 10(186.5,-125) 11(186.5,-75) 12(186.5,-25) 13(186.5,25) 14(186.5,75) 15(186.5,125) 16(186.5,175)
  silkscreen extent -155,-212 244,212, body extent -209,-206 209,206, height 104
STA_CSRN2512_STP [mil]
  rect 40x130 smd paste+0 mask+0: 1(-117,0) 2(117,0)
  Top Layer keep-out region: -95,-63 -95,63 95,63 95,-63
  Keep-Out Layer region: -95,-65 -95,65 95,65 95,-65
  silkscreen extent -85,-70 85,70, body extent -129,-65 129,65, height 28
TO229P994X256-3N-V [mm] "TO,2.29mm pitch;2 pin,9.94mm L X 6.095mm W X 2.56mm H body"
  rect 2.2x1.2 smd paste+0 mask+0: 1(-3.15,2.28) 3(-3.15,-2.28)
  rect 6.4x5.8 smd paste+0 mask+0: 2(3.15,0)
  silkscreen extent -3.27,-3.3 -0.2,3.53, body extent -3.94,-3.25 6.04,3.25, height 2.36
TO-220AC_STM [mil]
  round 80 / inner round 60 / far side round 80 hole 60 paste-99999 mask-40: 1(0,0) 2(198.82,0)
  silkscreen extent -143,-70 309,122, body extent -106,-64 304,116, height 620
WCAP-FTDB_L42W30H45 [mm] "Film Capacitor, THT, body 42.00x30.00mm"
  round 2.25 hole 1.5: 1(-18.75,10.15) 1(-18.75,-10.15) 2(18.75,10.15) 2(18.75,-10.15)
  silkscreen extent -21.5,-15.5 21.5,15.5, body extent -21,-15 21,15, height 45
WE-HCFT_3540_7443763540330 [mm] "THT High Current Inductor, body 36x41mm"
  rrect50% 10x3.6 hole 1.6 square: 1(-7.15,-13.85) 2(7.15,13.85)
  round 3.75 hole 2.5: MH1(-7.15,13.85) MH2(7.15,-13.85)
  silkscreen extent -18,-20.5 18,20.5, body extent -17.6,-20.26 17.6,20.25, height 33.45
YAG_CC0603_YAG [mil]
  rect 38x36 smd paste+0 mask+0: 1(-28.5,0) 2(28.5,0)
  body extent -34,-18 34,18, height 36